# Altium PCB PCB1.PcbDoc
Units mm, origin at the board's own origin, x right, y up, seen from the top; angles counter-clockwise.
Board outline 152.4 x 101.6 mm, 2 copper layers (Top Layer, Bottom Layer); 31 components, 21 nets, 81 pads, 0 vias.
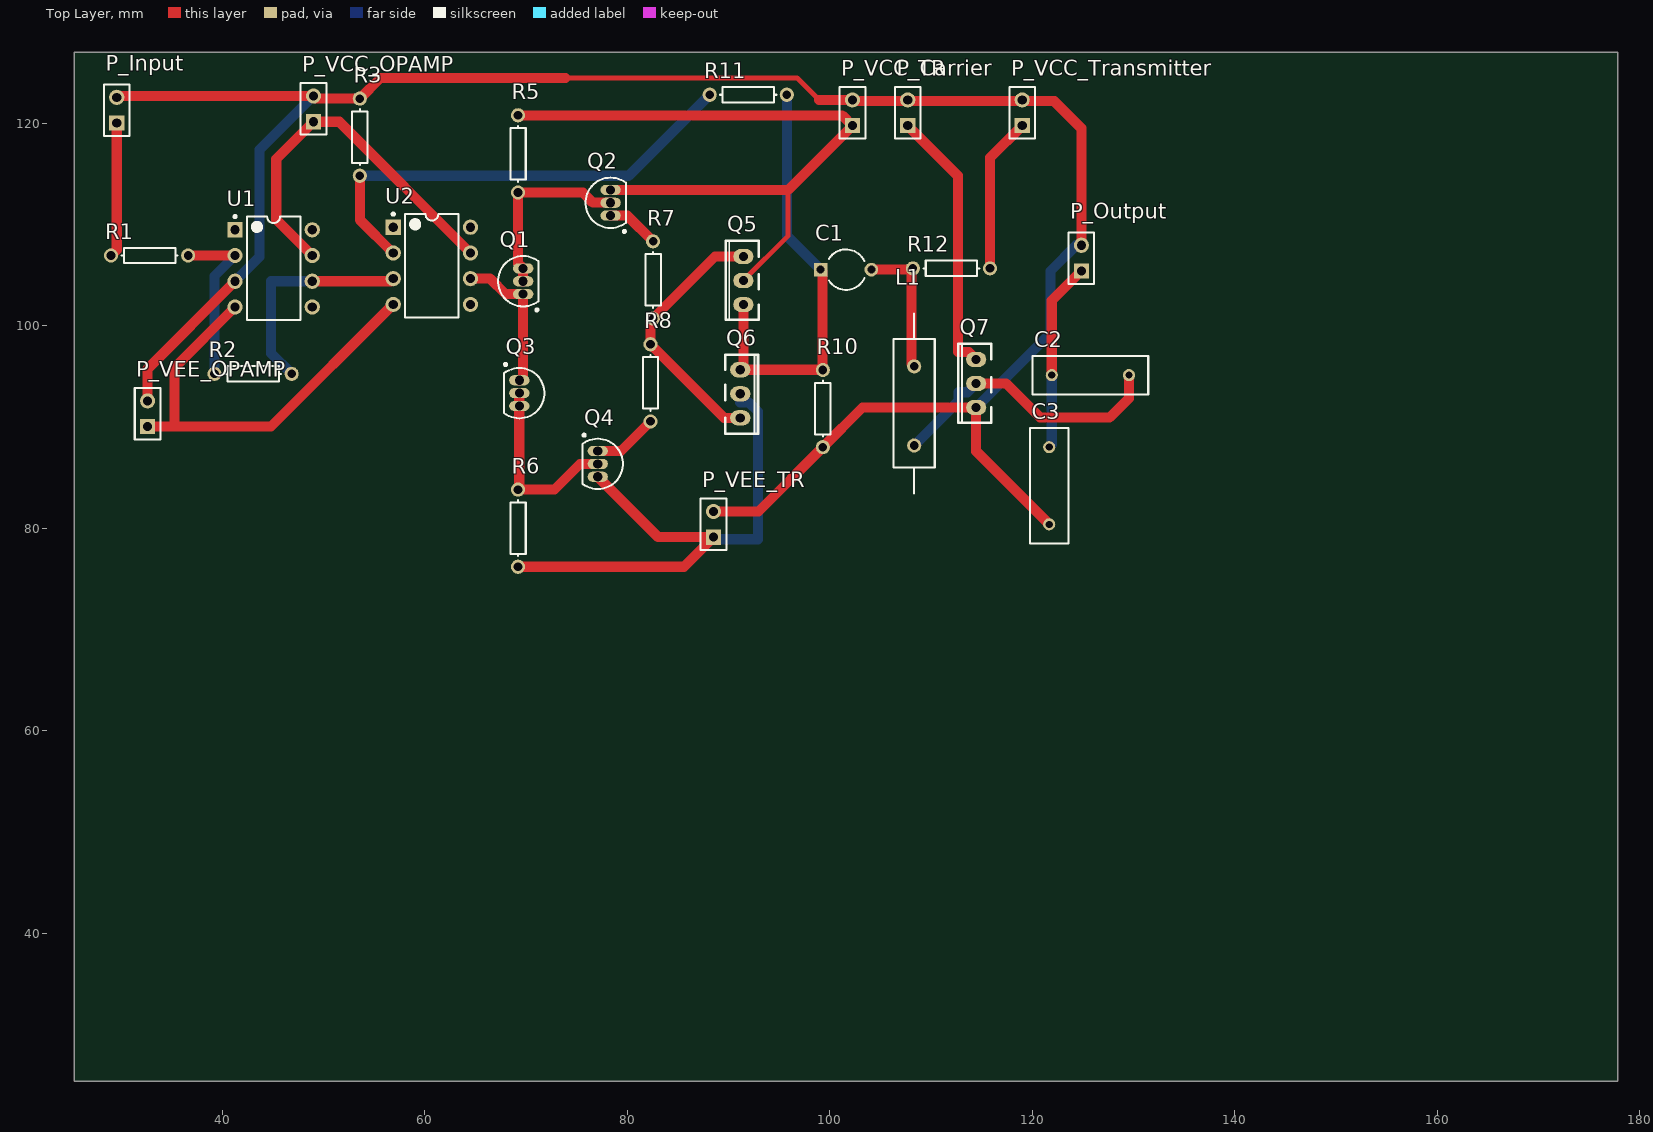
[diagram p0: Top Layer view]
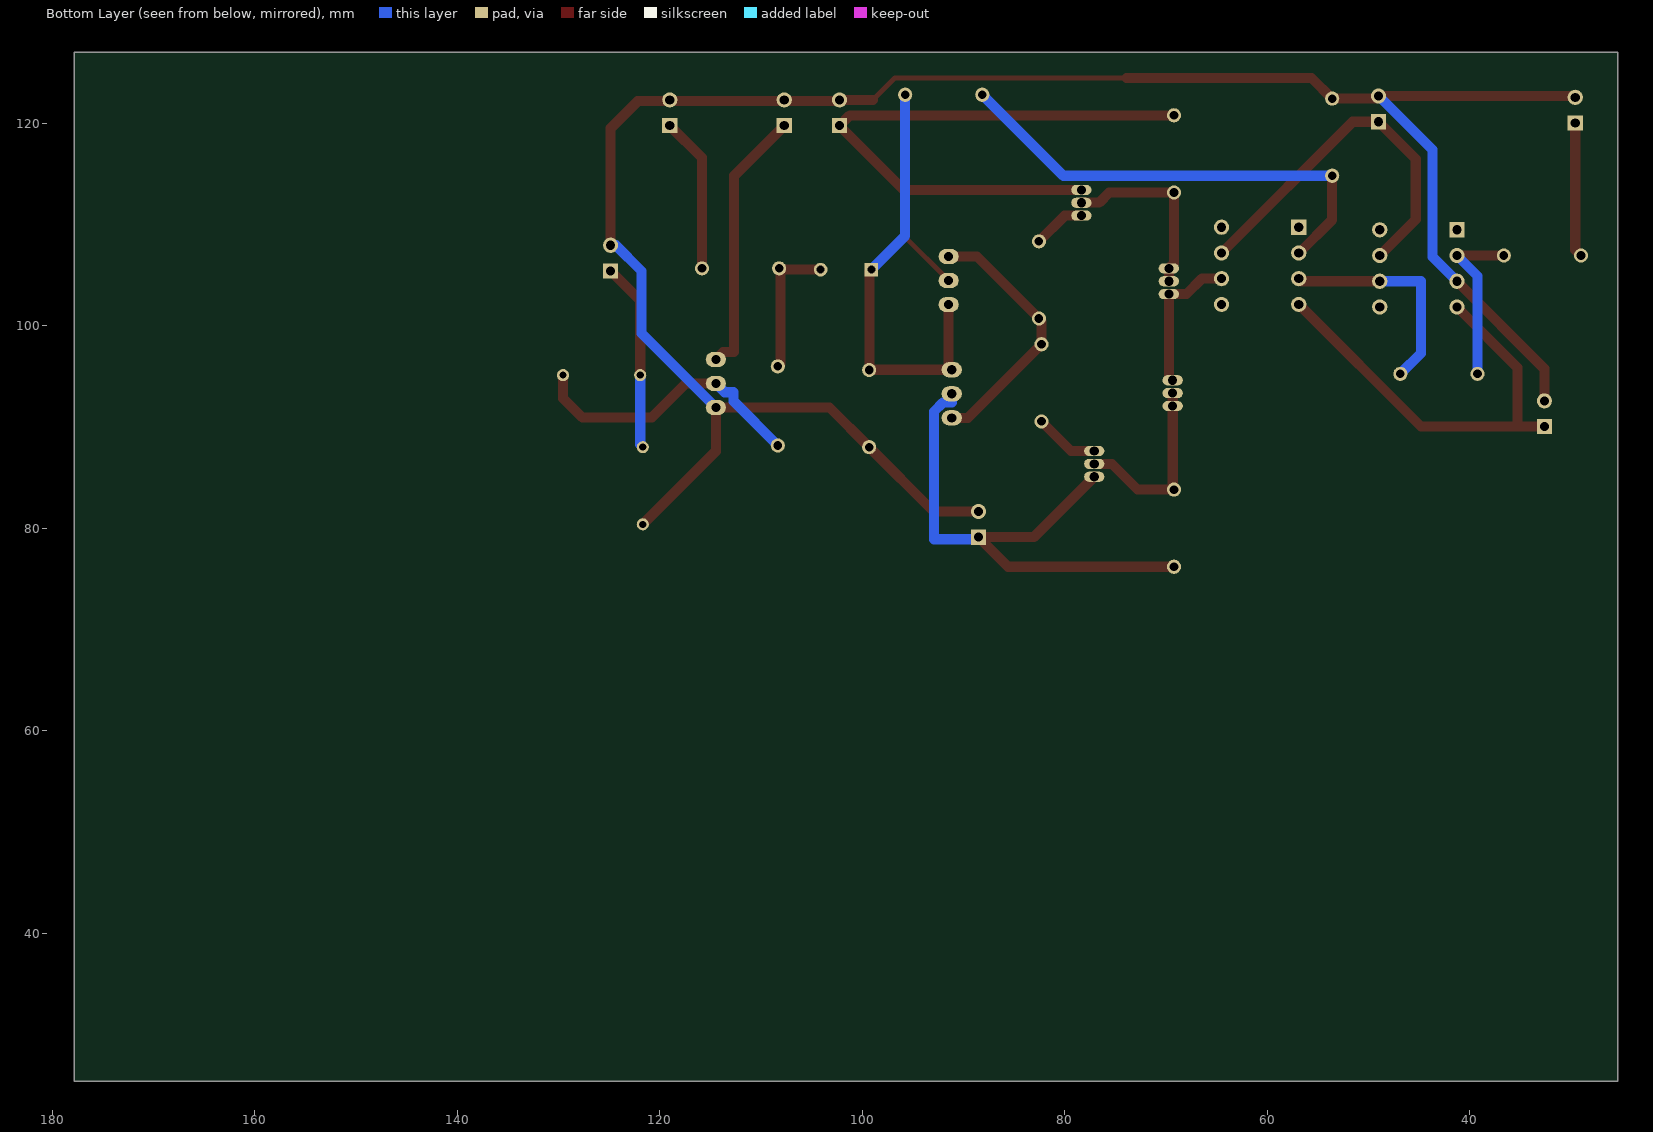
[diagram p1: Bottom Layer view, seen from below]

## Layer stack, top to bottom
Top Solder: solder mask 0.0102, Solder Resist, Dk 3.5
Top Layer: signal copper 0.0356
Dielectric 1: dielectric 0.32, FR-4, Dk 4.8
Bottom Layer: signal copper 0.0356
Bottom Solder: solder mask 0.0102, Solder Resist, Dk 3.5

## Board outline
25.4,25.4 177.8,25.4 177.8,127 25.4,127

## Design rules (kind name [scope] priority, off if disabled: settings)
Clearance [All] p1: gap=0.254
PolygonConnect [All] p1: connectstyle=Relief reliefconductorwidth=0.254 reliefentries=4 polygonreliefangle="90 Angle" airgapwidth=0.254
RoutingVias [All] p1: holewidth=0.711 width=1.27 viastyle="Through Hole" minholewidth=0.711 minwidth=1.27 maxholewidth=0.711 maxwidth=1.27
SolderMaskExpansion [All] p1: expansion=0.102
Width [All] p1: maxlimit=1.5 minlimit=0.5 preferedwidth=1
30 further rules are at their usual default settings.

## Components (designator, comment, footprint, x,y, rotation, side; value= is the part's Value field where it differs from the comment)
C1 "Cap2" CAPR5-4X5 101.6,105.537 r0 top
C2 "Cap" RAD-0.3 125.73,95.123 r180 top
C3 "Cap" RAD-0.3 121.666,84.201 r90 top
L1 "Inductor Adj" AXIAL-0.8 108.331,92.329 r90 top
P_Carrier "Header 2" HDR1X2 107.696,119.761 r90 top
P_Input "Header 2" HDR1X2 29.591,120.015 r90 top
P_Output "Header 2" HDR1X2 124.841,105.41 r90 top
P_VCC_OPAMP "Header 2" HDR1X2 49.022,120.142 r90 top
P_VCC_TR "Header 2" HDR1X2 102.235,119.761 r90 top
P_VCC_Transmitter "Header 2" HDR1X2 118.999,119.761 r90 top
P_VEE_OPAMP "Header 2" HDR1X2 32.639,90.043 r90 top
P_VEE_TR "Header 2" HDR1X2 88.519,79.121 r90 top
Q1 "2N3904" TO-92A 69.723,104.394 r0 top
Q2 "2N3904" TO-92A 78.359,112.141 r0 top
Q3 "2N3906" TO-92A 69.342,93.345 r180 top
Q4 "2N3906" TO-92A 77.089,86.36 r180 top
Q5 "BD139" SOT-32 92.964,100.584 r90 top
Q6 "BD138" SOT-32 89.662,97.155 r270 top
Q7 "BD139" SOT-32 115.951,90.424 r90 top
R1 "Res1" AXIAL-0.3 32.833,106.934 r180 top
R2 "Res1" AXIAL-0.3 43.053,95.25 r0 top
R3 "Res1" AXIAL-0.3 53.594,118.618 r90 top
R5 "Res1" AXIAL-0.3 69.215,116.967 r90 top
R6 "Res1" AXIAL-0.3 69.215,80.01 r90 top
R7 "Res1" AXIAL-0.3 82.55,104.521 r90 top
R8 "Res1" AXIAL-0.3 82.296,94.361 r90 top
R10 "Res1" AXIAL-0.3 99.314,91.821 r90 top
R11 "Res1" AXIAL-0.3 91.948,122.809 r180 top
R12 "Res1" AXIAL-0.3 112.014,105.664 r180 top
U1 "UA741CP" TI-P8 45.085,105.664 r0 top
U2 "UA741CP" TI-P8 60.706,105.918 r0 top

## Footprints (in the part's own frame and the unit in brackets; to place one, negate y for a bottom-side part, rotate by r counter-clockwise, add the part's x,y. Pads: shape width x height; smd on the part's side, far side on the other; paste and mask are expansions set on the pad)
AXIAL-0.3 [mm] "Axial Device, Thru-Hole; 2 Leads; 0.3 in Pin Spacing"
  round 1.4 hole 0.85: 1(-3.81,0) 2(3.81,0)
  silkscreen extent -2.77,-0.76 2.77,0.76
AXIAL-0.8 [mm] "Axial Device, Thru-Hole; 2 Leads; 0.8 in Pin Spacing"
  round 1.4 hole 0.85: 1(-4.16,0) 2(3.66,0)
  silkscreen extent -8.89,-2.03 8.89,2.03
CAPR5-4X5 [mm] "Capacitor; 2 Leads"
  rect 1.35x1.35 hole 0.8: 1(-2.5,0)
  round 1.35 hole 0.8: 2(2.5,0)
  silkscreen extent -1.69,-2 1.82,2
HDR1X2 [mm] "Connector; Header; 2 Position"
  rect 1.5x1.5 hole 0.9: 1(0,0)
  round 1.5 hole 0.9: 2(2.54,0)
  silkscreen extent -1.27,-1.27 3.81,1.27
RAD-0.3 [mm] "Radial Cap, Thru-Hole; 2 Leads; 0.3 in Pin Spacing"
  round 1.2 hole 0.7: 1(-3.81,0) 2(3.81,0)
  silkscreen extent -5.71,-1.91 5.71,1.91
SOT-32 [mm]
  oval 1.5x2 hole 0.9: B(6.25,1.5) C(3.875,1.5) E(1.5,1.5)
  silkscreen extent 0,0 7.8,3.25
TI-P8 [mm] "DIP, 8-Leads, Body 9.59x6.35mm, Pitch 2.54mm"
  rect 1.5x1.5 hole 0.9: 1(-3.81,3.81)
  round 1.5 hole 0.9: 2(-3.81,1.27) 3(-3.81,-1.27) 4(-3.81,-3.81) 5(3.81,-3.81) 6(3.81,-1.27) 7(3.81,1.27) 8(3.81,3.81)
  silkscreen extent -3.93,-5.1 2.65,5.23, body extent -3.95,-5.07 3.95,5.07, height 5.08
TO-92A [mm] "TO, Flat Index; 3 In-Line, Axial Leads; Body Dia. 4.5mm; Leads 0.51 x 0.48 mm (max)"
  oval 2x1 hole 0.9: 1(0,-1.27) 2(0,0) 3(0,1.27)
  silkscreen extent -2.48,-2.95 1.5,2.48, body extent -2.48,-2.5 1.5,2.5, height 6.86

## Part data
C1 C2 C3: "Capacitor"
L1: "Adjustable Inductor"
P_Carrier P_Input P_Output P_VCC_OPAMP P_VCC_TR P_VCC_Transmitter P_VEE_OPAMP P_VEE_TR: "Header, 2-Pin"
Q1 Q2: "NPN General Purpose Amplifier"
Q3 Q4: "PNP General Purpose Amplifier"
Q5 Q7: "NPN Transistor"
Q6: "PNP Transistor"
R1 R2 R3 R5 R6 R7 R8 R10 R11 R12: "Resistor"
U1 U2: "General-Purpose Operational Amplifier, 7 to 36 V, 0 to 70 degC, 8-pin DIP (P8), Pb-Free (RoHS)"

## Nets (pads, with @x,y where several pads share a name; then routed paths per layer and width w, separated by ;. In a path a pad name is that pad's centre, name@x,y a point inside that pad or via, vN(x,y) a via of type N, cw(c..) or ccw(c..) an arc to the next point about the centre after c; other vN are vias at no path point)
GND: C3.1 P_Carrier.2 P_Input.2 P_Output.2 P_VCC_OPAMP.2 P_VCC_TR.2 P_VCC_Transmitter.2 P_VEE_OPAMP.2 P_VEE_TR.2 Q7.E R3.2 R10.1 U1.3 | length 211.7
  Top Layer w0.5: 73.914,124.46 96.774,124.46 98.933,122.301
  Top Layer w1: P_Input.2@29.718,122.682 P_VCC_OPAMP.2 49.276,122.428 R3.2 55.626,124.46 73.914,124.46 ; P_VEE_OPAMP.2 32.639,95.758 U1.3 ; P_VEE_TR.2 92.964,81.661 R10.1 103.227,91.924 Q7.E 114.451,87.606 C3.1 ; 98.933,122.301 P_VCC_TR.2 ; P_VCC_TR.2@102.362,122.174 122.174,122.174 124.841,119.507 P_Output.2
  Bottom Layer w1: U1.3 43.688,106.807 43.688,117.374 48.996,122.682 P_VCC_OPAMP.2 ; Q7.E 114.453,91.924 121.793,99.264 121.793,105.41 124.333,107.95 P_Output.2
NetC1_1: C1.1 Q5.E Q6.E R10.2 R11.1 | length 43
  Top Layer w1: Q5.E 91.464,95.957 Q6.E 99.29,95.655 C1.1@99.29,105.347
  Bottom Layer w1: R11.1 95.758,108.879 C1.1
NetC1_2: C1.2 L1.2 R12.2 | length 13.6
  Top Layer w1: C1.2 108.077,105.537 108.077,96.243 L1.2
NetC2_1: C2.1 L1.1 Q7.C | length 28.7
  Top Layer w1: Q7.C 117.41,94.299 120.777,90.932 127.635,90.932 129.54,92.837 C2.1
  Bottom Layer w1: L1.1 108.331,88.179 112.697,92.545 112.697,93.428 113.58,93.428 Q7.C
NetC2_2: C2.2 C3.2 P_Output.1 | length 18.7
  Top Layer w1: C2.2 121.92,102.489 P_Output.1
  Bottom Layer w1: C3.2 121.92,88.265 C2.2
NetP_Carrier_1: P_Carrier.1 Q7.B | length 26.5
  Top Layer w1: P_Carrier.1 112.649,114.808 112.649,97.409 113.716,97.409 Q7.B
NetP_Input_1: P_Input.1 R1.2 | length 13.3
  Top Layer w1: R1.2 29.591,107.502 P_Input.1
NetQ1_1: Q1.1 Q3.1 U2.6 | length 14.5
  Top Layer w1: U2.6 66.461,104.648 67.969,103.14 Q1.1@69.707,103.14 ; Q3.1 69.723,94.996 Q1.1
NetQ1_2: Q1.2 Q1.3 Q2.2 R5.1 | length 18.5
  Top Layer w1: Q1.2 Q1.3 69.215,106.172 R5.1 75.605,113.157 76.605,112.157 78.343,112.157 Q2.2
NetQ2_1: Q2.1 R7.2 | length 5.2
  Top Layer w1: Q2.1 80.01,110.871 R7.2
NetQ3_2: Q3.2 Q3.3 Q4.2 R6.2 | length 18.5
  Top Layer w1: Q3.2 Q3.3 69.342,83.947 R6.2 72.811,83.82 75.335,86.344 77.073,86.344 Q4.2
NetQ4_1: Q4.1 R8.1 | length 6.4
  Top Layer w1: Q4.1 79.375,87.63 R8.1
NetQ5_B: Q5.B Q6.B R7.1 R8.2 | length 26
  Top Layer w1: Q6.B 89.562,90.905 R8.2 82.296,100.457 R7.1 88.673,106.834 Q5.B
NetR1_1: R1.1 R2.1 U1.2 | length 17.2
  Top Layer w1: R1.1 U1.2
  Bottom Layer w1: R2.1 39.243,104.902 U1.2
NetR2_2: R2.2 U1.6 U2.3 | length 22.2
  Top Layer w1: U1.6 56.642,104.394 U2.3
  Bottom Layer w1: R2.2 44.831,97.282 44.831,104.394 U1.6
NetR3_1: R3.1 R11.2 U2.2 | length 46.9
  Top Layer w1: R3.1 53.594,110.464 56.87,107.188 U2.2
  Bottom Layer w1: R3.1 80.137,114.808 R11.2
VCC_OP: P_VCC_OPAMP.1 U1.7 U2.7 | length 37.1
  Top Layer w1: U1.7 45.339,110.49 45.339,116.459 P_VCC_OPAMP.1 51.562,120.142 U2.7
VCC_TR: P_VCC_TR.1 Q2.3 Q5.C R5.2 | length 70.7
  Top Layer w0.5: Q5.C 95.885,108.88 95.885,113.411
  Top Layer w1: R5.2 101.219,120.777 P_VCC_TR.1 95.885,113.411 Q2.3
VCC_TRANSMITTER: P_VCC_Transmitter.1 R12.1 | length 15.4
  Top Layer w1: R12.1 115.824,116.586 P_VCC_Transmitter.1
VEE_OP: P_VEE_OPAMP.1 U1.4 U2.4 | length 43.5
  Top Layer w1: P_VEE_OPAMP.1 35.306,90.043 ; U1.4 35.306,95.885 35.306,90.043 ; U2.4 44.831,90.043 35.306,90.043
VEE_TR: P_VEE_TR.1 Q4.3 Q6.C R6.1 | length 54.5
  Top Layer w1: R6.1 85.598,76.2 P_VEE_TR.1 83.058,79.121 Q4.3
  Bottom Layer w1: P_VEE_TR.1 88.725,78.915 92.916,78.915 92.916,91.528 92.035,92.409 91.162,92.409 Q6.C
pads on no net: U1.1 U1.5 U1.8 U2.1 U2.5 U2.8

## Silkscreen, mask and mechanical layers (free items; w line width, h text height)
Mechanical 1:
  lines w1: 26.797,125.349 27.178,125.73 132.334,125.73 132.334,74.295 26.797,74.295 26.797,125.603